# Altium PCB PCB2.PcbDoc
Units mil, origin at the board's own origin, x right, y up, seen from the top; angles counter-clockwise.
Board outline 2980 x 1985 mil, 2 copper layers (Top Layer, Bottom Layer); 26 components, 20 nets, 129 pads, 4 vias.
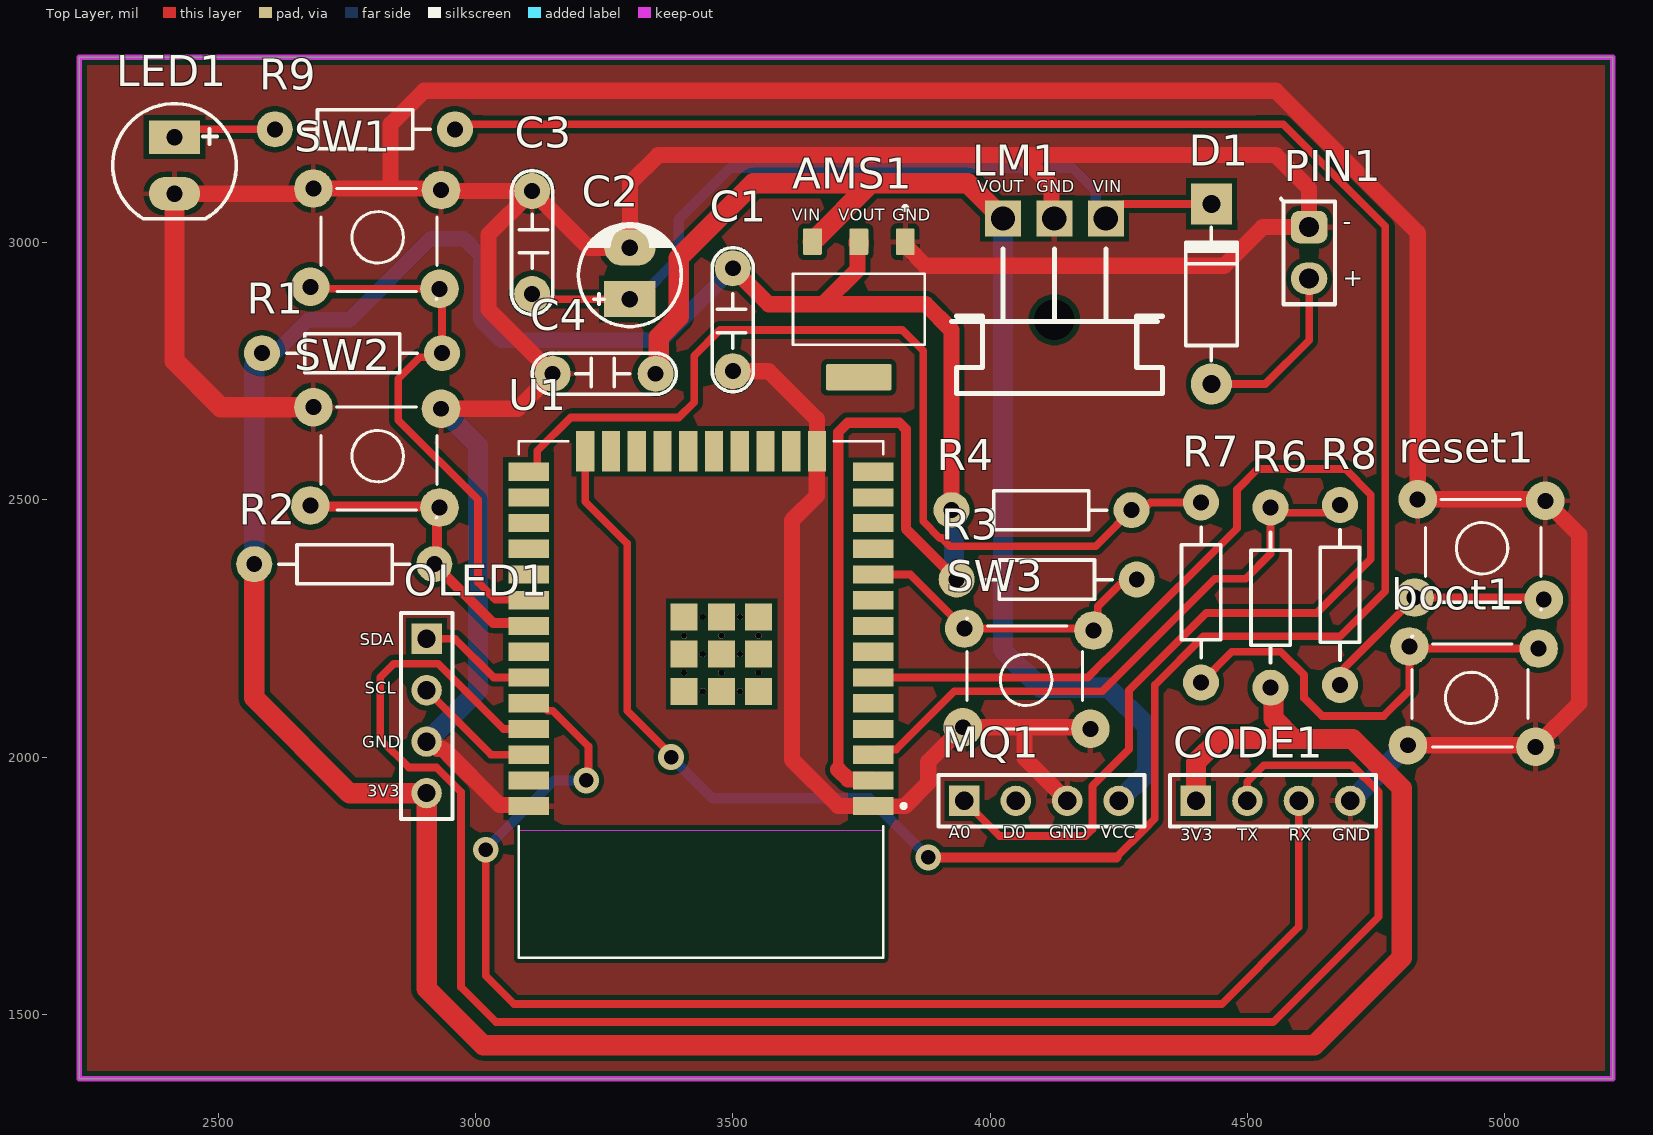
[diagram p0: Top Layer view]
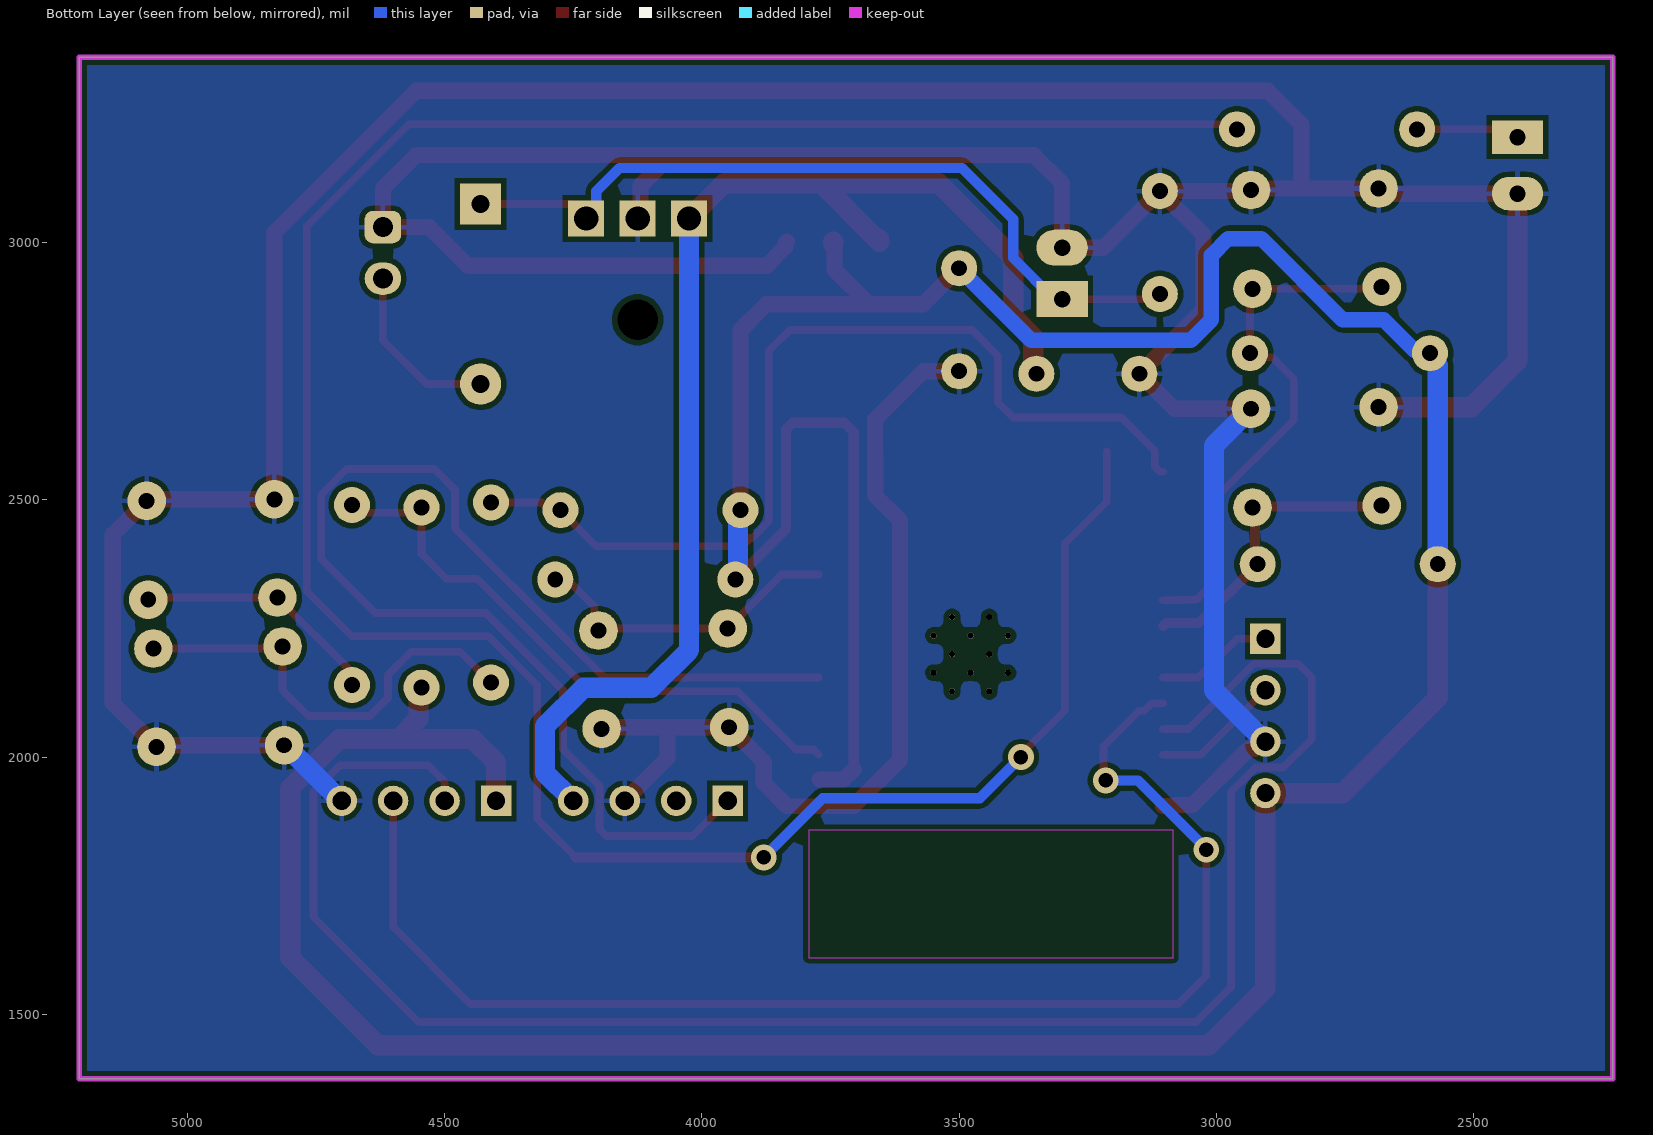
[diagram p1: Bottom Layer view, seen from below]
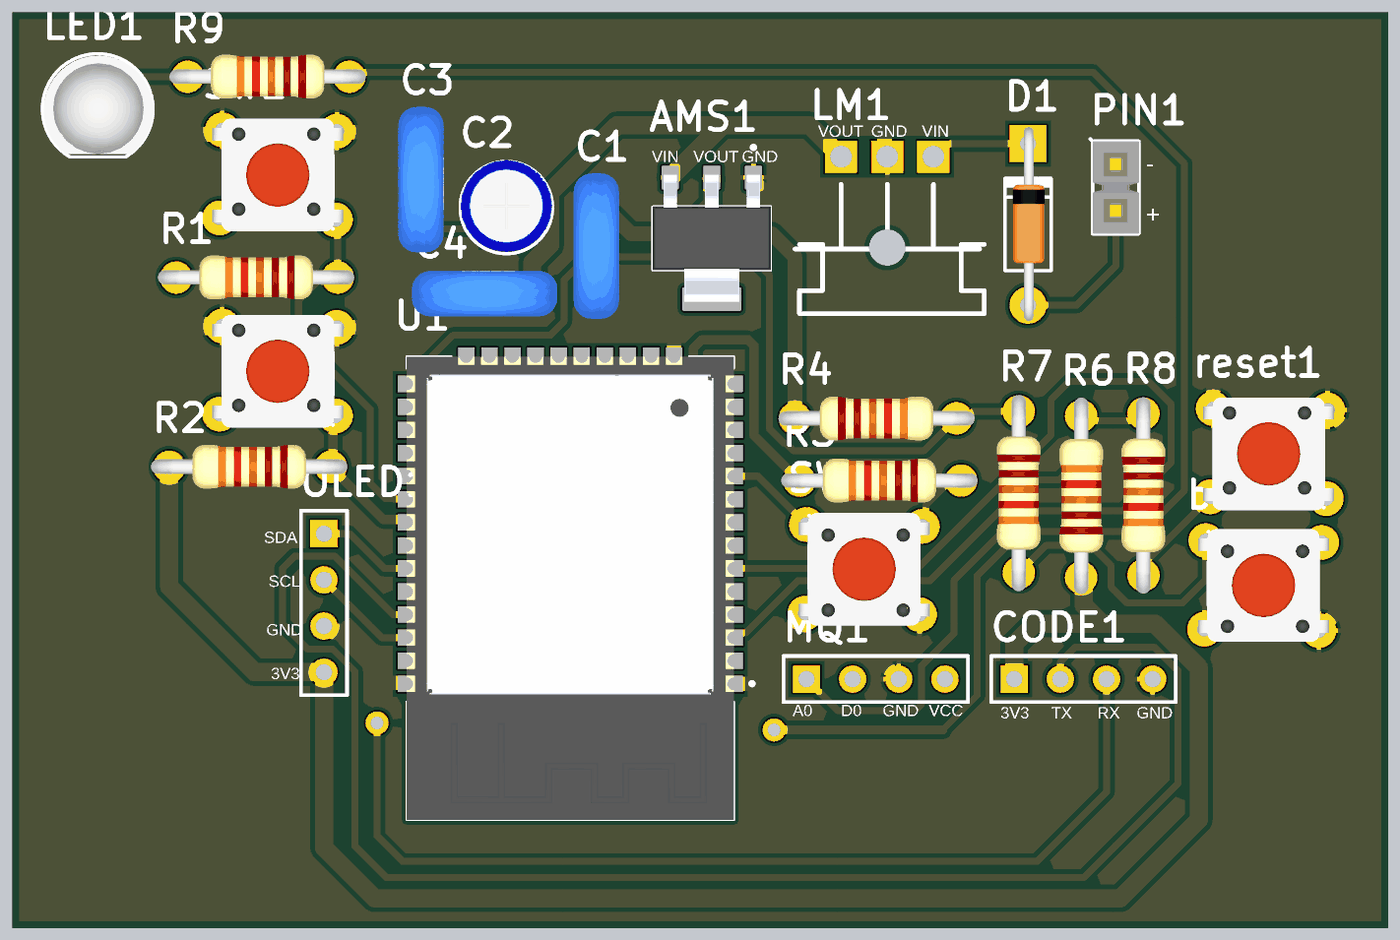
[diagram p2: 3D render of the assembled board from above, using the file's embedded part models]

## Layer stack, top to bottom
Top Solder: solder mask 0.4, Solder Resist, Dk 3.5
Top Layer: signal copper 1.4
Dielectric 1: dielectric 12.6, FR-4, Dk 4.8
Bottom Layer: signal copper 1.4
Bottom Solder: solder mask 0.4, Solder Resist, Dk 3.5

## Board outline
2230,1375 5210,1375 5210,3360 2230,3360

## Design rules (kind name [scope] priority, off if disabled: settings)
Clearance Clearance_1 [All] p1: gap=10 ignorepadtopadclearanceinfootprint=FALSE
Clearance IO2 [InNet('I02') And OnLayer('Top Layer') vs InNet('I02') And OnLayer('Top Layer')] p2: gap=0.3 ignorepadtopadclearanceinfootprint=FALSE
HoleSize [All] p1: absolutevalues=TRUE maxlimit=100 minlimit=11.81 maxpercent=80.000 minpercent=20.000
MinimumAnnularRing [All] p1: minimumring=5.91
PolygonConnect [All] p1: connectstyle=Relief reliefconductorwidth=10 reliefentries=4 polygonreliefangle="90 Angle" airgapwidth=10
RoutingVias [All] p1: holewidth=28 width=50 viastyle="Through Hole" minholewidth=28 minwidth=50 maxholewidth=28 maxwidth=50
SolderMaskExpansion [All] p1: expansion=4 istentingtop=FALSE
SupplyNets "Schematic Supply Nets_3" [InNet('5V')] p1: voltage=0.000
SupplyNets "Schematic Supply Nets_2" [InNet('GND')] p2: voltage=0.000
SupplyNets "Schematic Supply Nets_1" [InNet('3.3V')] p3: voltage=0.000
Width 5V [InNet('5V')] p1: maxlimit=39.37 minlimit=19.68 preferedwidth=31.5
Width GND [InNet('GND')] p2: maxlimit=39.37 minlimit=19.68 preferedwidth=31.5
Width 3.3V [InNet('3.3V')] p3: maxlimit=39.37 minlimit=19.68 preferedwidth=31.5
Width [All] p4: maxlimit=20 minlimit=10 preferedwidth=15
29 further rules are at their usual default settings.

## Components (designator, comment, footprint, x,y, rotation, side; value= is the part's Value field where it differs from the comment)
AMS1 "AMS1117-3.3" SOT229P700X180-4N 3745,2870 r270 top
boot1 "boot" SW4 5060,2020 r180 top value="Button chip 4 pin"
C1 "104" CN2 3500,2750 r90 top value=0.1uF
C2 "10uF" CP1/2 3300,2890 r90 top value=10uF/50V
C3 "104" CN2 3110,3100 r270 top value=0.1uF
C4 "104" CN2 3150,2745 r0 top value=0.1uF
CODE1 "code" HDR1X4 4400,1915 r0 top
D1 "1N4007" D1A 4430,2725 r270 top
LED1 "LED" LED-5TRED 2415,3150 r270 top value="LED 3 ly Single Colour"
LM1 "LM7805" TO-220 4225,3046.85 r180 top
MQ1 "MQ3" HDR1X4 3950,1915 r0 top
OLED1 "OLED" HDR1X4 2905,2230 r270 top
PIN1 "pin 9v" HDR/Header/2 4620,2980 r270 top
R1 "10k" R1/4W 2585,2785 r0 top value="R1/4W - 1K"
R2 "10k" R1/4W 2570,2375 r0 top value="R1/4W - 1K"
R3 "10k" R1/4W 3935,2345 r0 top value="R1/4W - 1K"
R4 "10k" R1/4W 4275,2480 r180 top value="R1/4W - 1K"
R6 "10k" R1/4W 4545,2485 r270 top value="R1/4W - 1K"
R7 "470" R1/4W 4410,2145 r90 top value="R1/4W - 1K"
R8 "470" R1/4W 4680,2140 r90 top value="R1/4W - 1K"
R9 "220" R1/4W 2610,3220 r0 top value="R1/4W - 1K"
reset1 "reset" SW4 4831,2501 r0 top value="Button chip 4 pin"
SW1 "xe may" SW4 2685,3105 r0 top value="Button chip 4 pin"
SW2 "o to" SW4 2685,2680 r0 top value="Button chip 4 pin"
SW3 "SW" SW4 4195,2055 r180 top value="Button chip 4 pin"
U1 "ESP32-WROOM-32" MODULE_ESP32-WROOM-32 3438.39,2111.81 r180 top

## Footprints (in the part's own frame and the unit in brackets; to place one, negate y for a bottom-side part, rotate by r counter-clockwise, add the part's x,y. Pads: shape width x height; smd on the part's side, far side on the other; paste and mask are expansions set on the pad)
CN2 [mil]
  round 70 hole 31: 1(0,0) 2(200,0)
  silkscreen extent -40,-40 240,40, body extent -54,-44 260,55, height 407
CP1/2 [mil] "Tu hoa < 22uF/16>50V"
  rect 70x100 hole 32: 1(0,0)
  oval 70x100 hole 32: 2(100,0)
  silkscreen extent -53,-100 146,100, body extent -49,-99 149,99, height 287
D1A [mil] "Diode 1A, W 100mil, L 350mil"
  round 80 hole 35: 1(0,0)
  rect 80x80 hole 35: 2(-350,0)
  silkscreen extent -305,-50 -45,50, body extent -386,-33 34,36, height 84
HDR1X4 [mm] "Connector; Header; 4 Position"
  rect 1.5x1.5 hole 0.9: 1(0,0)
  round 1.5 hole 0.9: 2(2.54,0) 3(5.08,0) 4(7.62,0)
  silkscreen extent -1.27,-1.27 8.89,1.27, body extent -1.27,-1.27 8.89,1.27, height 7
HDR/Header/2 [mm]
  rrect50% 1.6x1.8 hole 1: 1(-1.27,0)
  oval 1.6x1.8 hole 1: 2(1.27,0)
  silkscreen extent -2.67,-1.4 2.54,1.27, body extent -2.54,-1.27 2.54,1.27, height 8.89
LED-5TRED [mil] "LED 2 PIN, 5 ly , Only colour, pin to pin 110mil"
  rect 65x100 hole 32: 1(-55,0)
  oval 65x100 hole 32: 2(55,0)
  silkscreen extent -120,-120 104,120, body extent -116,-117 98,120, height 339
MODULE_ESP32-WROOM-32 [mm]
  rect 2x0.9 smd: 1(-8.5,5.26) 2(-8.5,3.99) 3(-8.5,2.72) 4(-8.5,1.45) 5(-8.5,0.18) 6(-8.5,-1.09) 7(-8.5,-2.36) 8(-8.5,-3.63) 9(-8.5,-4.9) 10(-8.5,-6.17) 11(-8.5,-7.44) 12(-8.5,-8.71) 13(-8.5,-9.98) 14(-8.5,-11.25) 25(8.5,-11.25) 26(8.5,-9.98) 27(8.5,-8.71) 28(8.5,-7.44) 29(8.5,-6.17) 30(8.5,-4.9) 31(8.5,-3.63) 32(8.5,-2.36) 33(8.5,-1.09) 34(8.5,0.18) 35(8.5,1.45) 36(8.5,2.72) 37(8.5,3.99) 38(8.5,5.26)
  rect 0.9x2 smd: 15(-5.715,-12.25) 16(-4.445,-12.25) 17(-3.175,-12.25) 18(-1.905,-12.25) 19(-0.635,-12.25) 20(0.635,-12.25) 21(1.905,-12.25) 22(3.175,-12.25) 23(4.445,-12.25) 24(5.715,-12.25)
  rect 1.33x1.33 smd: 39_1(-2.835,-0.405) 39_2(-1,-0.405) 39_3(0.835,-0.405) 39_4(-2.835,-2.24) 39_5(-1,-2.24) 39_6(0.835,-2.24) 39_7(-2.835,-4.075) 39_8(-1,-4.075) 39_9(0.835,-4.075)
  round 0.3 hole 0.3: 39_10(-1.918,-0.405) 39_11(-0.083,-0.405) 39_12(-2.835,-1.323) 39_13(-1,-1.323) 39_14(0.835,-1.323) 39_15(-1.918,-2.24) 39_16(-0.083,-2.24) 39_17(-2.835,-3.157) 39_18(-1,-3.157) 39_19(0.835,-3.157) 39_20(-1.918,-4.075) 39_21(-0.083,-4.075)
  Keep-Out Layer region: 9,6.45 -9,6.45 -9,12.75 9,12.75
  Keep-Out Layer region: 9,6.45 -9,6.45 -9,12.75 9,12.75
  silkscreen extent -10.1,-12.75 9,12.75, body extent -9,-12.75 9,12.75, height 3.25
R1/4W [mil] "R 1/4W, 2 Pin, 350mil"
  round 70 hole 31: 1(0,0) 2(350,0)
  silkscreen extent 48,-38 302,38, body extent -40,-47 386,47, height 111
SOT229P700X180-4N [mm]
  rrect15% 1.31x0.93 smd: 1(-3.345,2.29) 2(-3.345,0) 3(-3.345,-2.29)
  rrect15% 1.31x3.24 smd: 4(3.345,0)
  silkscreen extent -5.1,-3.25 1.75,3.25, body extent -3.5,-3.25 3.5,3.25, height 1.8
SW4 [mil] "SW button 4pin, 250 x250 mil"
  round 75 hole 31: 1(0,0) 2(245,-195) 3(248,-3) 4(-6,-191)
  silkscreen extent 15,-215 240,0, body extent -36,-220 276,24, height 276
TO-220 [mil]
  round 70 hole 78.74 unplated: 0(100,196.85)
  rect 70x70 hole 47.24 unplated: 1(0,0) 2(100,0) 3(200,0)
  silkscreen extent -110,60 300,340

## Part data
AMS1: "Sot223/Pkg 1-Amp 3.3-Volt Low Drop Out Voltage Regulatator", Package="SOT-223 Seeed Technology", Availability="Not in stock", Check_prices=https://www.snapeda.com/parts/AMS1117-3.3/Advanced+Monolithic+Systems/view-part/?ref=eda, MF="Advanced Monolithic Systems", MP=AMS1117-3.3, Price=None, SnapEDA_Link=https://www.snapeda.com/parts/AMS1117-3.3/Advanced+Monolithic+Systems/view-part/?ref=snap
boot1 reset1 SW1 SW2 SW3: library part SW4, "Switch button 4 pin"
C1 C3 C4: library part CN2, "Cap np 104 => 105pF"
C2: library part CP1, "Cap P  0,1uF < 22uF , 16 - 50V", Description 1="10 => 220uF/6,3V/10V - 10uF => 100uF/16V", Description 2="0,1uF => 33uF/50V - 10uF => 22uF/63V", Description 3="0,47uF => 10uF/100V"
CODE1 MQ1 OLED1: library part "Header 4", "Header, 4-Pin, Right Angle", LatestRevisionDate=17-Jul-2002, LatestRevisionNote="Re-released for DXP Platform.", Publisher="Altium Limited"
D1: library part D1A, "Diode 1A"
LED1: "LED Single colour Green and Red"
LM1: "TO-220", Text Field1=70, Text Field2=30
PIN1: library part "Header 2", "Header, 2-Pin"
R1 R2 R3 R4 R6 R7 R8 R9: library part R1/4W, "Resistor 1/4W"
U1: "Bluetooth, WiFi 802.11b/g/n, Bluetooth v4.2 + EDR, Class 1, 2 and 3 Transceiver Module 2.4GHz ~ 2.5GHz Integrated, Trace Surface Mount", Package="Module Espressif Systems", Availability=Unavailable, MF="Espressif Systems", MP=ESP32-WROOM-32D, Price=None, SnapEDA_Link=https://www.snapeda.com/parts/ESP32-WROOM-32D/Espressif%20Systems/view-part/2768115/?ref=snap

## Via types
v1: diameter 50, hole 28, Top Layer to Bottom Layer, 4 vias

## Nets (pads, with @x,y where several pads share a name; then routed paths per layer and width w, separated by ;. In a path a pad name is that pad's centre, name@x,y a point inside that pad or via, vN(x,y) a via of type N, cw(c..) or ccw(c..) an arc to the next point about the centre after c; other vN are vias at no path point)
3.3V: AMS1.2 C1.2 CODE1.1 OLED1.4 R1.1 R2.1 R3.1 R4.2 R6.2 U1.2 | length 8007.4
  Top Layer w20: 3705,1975.77 3705,2631.55 3723.45,2650 3824,2650 3836.5,2637.5 3836.5,2443.5 R3.1
  Top Layer w31.5: C1.2 3570,2880 3655,2880 3675,2880 ; 3705,1975.77 3724.07,1956.69 U1.2@3771.06,1956.69 ; AMS1.2 3742.44,2999.13 3742.44,2947.44 3675,2880 ; R4.2 3925,2830 3875,2880 3675,2880
  Top Layer w39.37: R2.1 2570,2115 2755,1930 OLED1.4 2905,1550 3015,1440 3046,1440 4630,1440 4800,1610 4800,1939.99 4744.81,1995.17 ; AMS1.2@3745,2996.97 AMS1.2 ; CODE1.1 4400,1990 4445,2035 4590,2035 ; R6.2 4550.86,2129.14 4550.86,2074.14 4590,2035 ; 4744.81,1995.18 4705,2035 4590,2035
  Bottom Layer w30: R1.1@2590.86,2790.86 2615.86,2790.86 2674.69,2849.69 2705.64,2849.69 2705.95,2850 2755,2850 2912.66,3007.66 2977.34,3007.66 3010,2975 3010,2850 3050,2810 3360,2810 C1.2
  Bottom Layer w39.37: R2.1 2570,2761.71 2585,2776.71 R1.1 R1.1@2590.86,2790.86 ; R4.2 3930,2475 3930,2350 R3.1
5V: AMS1.3 C4.2 LM1.3 MQ1.4 | length 2472.8
  Top Layer w39.37: C4.2 3355.86,2750.86 3355.86,2816.32 3395,2855.46 3395,2970 3540,3115 3768.15,3115 ; AMS1.3 3656.22,3003.07 3656.22,3007.79 3660.94,3007.79 3768.15,3115 ; LM1.3 3956.85,3115 3768.15,3115
  Bottom Layer w39.37: LM1.3 4025,2208.06 4098.06,2135 4230,2135 4305,2060 4305,1970 MQ1.4
A0: MQ1.1 U1.6 | length 2482.3
  Top Layer w15: U1.6 4189.72,2154.72 4224.19,2189.19 4224.53,2189.19 4257.81,2222.47 4257.81,2222.81 4480,2445 4480,2520 4520,2560 4690,2560 4740,2510 4740,2385 4635,2280 4420,2280 4270,2130 4270,2015 4198.84,1943.84 4198.84,1860 4185.65,1846.81 4018.19,1846.81 MQ1.1
D0: MQ1.2
D18: R1.2 SW1.2 SW1.4 U1.30 | length 1060.7
  Top Layer w15: SW1.4 2683,2910 SW1.2 2930,2885 2935,2885 R1.2 2926.84,2776.84 2891.84,2776.84 2850,2735 2850,2655 3005,2500 3005,2339.8 3033.89,2310.34 3038.21,2306.02 3071.87,2305.35 U1.30
D19: R2.2 SW2.2 SW2.4 U1.31 | length 606
  Top Layer w20: SW2.4 2681,2487 2928,2487 SW2.2 2925,2480 2925,2380 R2.2 3034.37,2260.63 3097.83,2260.63 U1.31
  Bottom Layer w20: SW2.4 SW2.4@2681,2487 ; SW2.2@2928,2487 SW2.2
D25: R3.2 SW3.2 SW3.4 U1.10 | length 620.6
  Top Layer w15: U1.10 3845.28,2354.72 SW3.2 4197,2250 SW3.4 4209.18,2254.18 4209.18,2292.68 4250.98,2334.48 4274.48,2334.48 R3.2
EN: R6.1 R8.2 U1.3 | length 1169
  Top Layer w15: U1.3 3783.25,2014.94 3817.65,2014.94 3930.62,2127.91 4217.91,2127.91 4436.84,2346.84 4496.84,2346.84 4545,2395 R6.1 4555,2475 4650.12,2475 4665.12,2490 R8.2
GND: AMS1.1 boot1.1 boot1.3 C1.1 C2.2 C3.1 C4.1 CODE1.4 LED1.2 LM1.2 MQ1.3 OLED1.3 PIN1.1 reset1.1 reset1.3 SW1.1 SW1.3 SW2.1 SW2.3 SW3.1 SW3.3 U1.1 U1.15 U1.38 | length 11524.9
  Top Layer w30: U1.1@3733.66,1905.25 3733.66,1904.72 U1.1 3834.72,1904.72
  Top Layer w31.5: LED1.2 2425.56,3095 2663.23,3095 2673.23,3105 SW1.1 2834.97,3105 ; OLED1.3 2912.46,2030 2926.24,2016.22 2934.91,2016.22 2937.23,2013.9 2939.75,2013.9 3046.96,1906.69 3080.12,1906.69 3082.09,1904.72 U1.38 ; SW2.3 3082,2677 C4.1 3025,2870 3025,3015 C3.1 ; C1.1 3570,2750 3663.39,2656.61 U1.15 3663.29,2593.99 3663.29,2508.29 3615,2460 3615,1995 3704.75,1905.25 U1.1@3733.66,1905.25 ; 3834.72,1904.72 3880,1950 3880,1991 SW3.3 4079.4,2058 ; AMS1.1 3837.72,2999.13 3837.72,2991.44 3874.16,2955 4455,2955 4530,3030 PIN1.1 4620,3105 4555,3170 4060,3170 ; 4067,2058 4067,1998 MQ1.3 ; 4082.55,2058 4192,2058 SW3.1 ; LM1.2 4119.36,3052.49 4119.36,3110.64 4060,3170 ; boot1.3 5057,2023 boot1.1 5144.87,2104.87 5144.87,2432.13 reset1.3 5076,2501 reset1.1 4831,3019 4555,3295 2900,3295 2834.97,3229.97 2834.97,3105 ; 2834.97,3105 2930,3105 SW1.3 2935,3100 C3.1 ; C3.1 3220,2990 C2.2 3300,3115 3355,3170 4060,3170
  Top Layer w39.37: LED1.2 2415,2770 2505,2680 SW2.1
  Bottom Layer w39.37: OLED1.3 3005,2130 3005,2605 SW2.3 ; CODE1.4 4702,1915 4810,2023 boot1.3
I02: R9.2 U1.24 | length 5084.1
  Top Layer w15: R9.2 2970,3230 4570,3230 4768.19,3031.81 4768.19,2322.19 4680.66,2234.66 4414.66,2234.66 4320,2140 4320,1880 4300,1860 4245,1805 ; U1.24 3213.39,2496.61 3295,2415 3295,2090 v1@3372.38,2012.62
  Top Layer w20: v1(3880,1805) 4245,1805
  Bottom Layer w20: v1(3380,2000) 3460,1920 3765,1920 v1@3878.01,1806.99
IDO: R4.1 R7.2 U1.25 | length 1893.9
  Top Layer w15: U1.25 3109.78,2554.72 3120,2564.94 3120,2595 3185,2660 3395,2660 3425,2690 3425,2780 3475,2830 3829.5,2830 3870,2789.5 3870,2458.19 3902.5,2425.69 3906.31,2425.69 3922,2410 4205,2410 4285.52,2490.52 4306.81,2490.52 4311.29,2495 R7.2
Netboot1_2: boot1.2 boot1.4 R7.1 | length 866.4
  Top Layer w15: R7.1 4470,2205 4565,2205 4610,2160 4610,2115 4645,2080 4765,2080 4815,2130 boot1.2 4819,2211 boot1.4
NetC2_1: C2.1 C3.2 D1.2 LM1.1 | length 1545.4
  Top Layer w15: C3.2 3120,2890 C2.1 ; LM1.1 4252.5,3074.35 4260.64,3074.35 4261.29,3075 D1.2
  Bottom Layer w20: C2.1 3315,2890 3395,2970 3395,3045 3495,3145 4160,3145 4205.36,3099.64 4205.36,3066.49 LM1.1
NetD1_1: D1.1 PIN1.2 | length 345.2
  Top Layer w15: D1.1 4535,2725 4620,2810 PIN1.2
NetLED1_1: LED1.1 R9.1 | length 176.2
  Top Layer w15: LED1.1 2430,3220 R9.1@2585,3220
NetR8_1: R8.1 reset1.2 reset1.4 | length 482.7
  Top Layer w15: R8.1 4680,2165 reset1.4 5072,2310 reset1.2
RX: CODE1.3 U1.34 | length 2625.3
  Top Layer w15: v1(3020,1820) 3020,1575 3075,1520 4450,1520 4600,1670 CODE1.3 ; U1.34 3125.39,2104.72 3140.18,2089.94 3150.36,2089.94 3219.42,2020.88 3219.42,1959.14 v1(3215,1954.72)
  Bottom Layer w20: v1(3020,1820) 3020,1822.1 3152.62,1954.72 v1(3215,1954.72)
SCL: OLED1.2 U1.36 | length 250.6
  Top Layer w15: OLED1.2 3030.28,2004.72 U1.36
SDA: OLED1.1 U1.33 | length 229.9
  Top Layer w15: OLED1.1 2960,2230 3035.28,2154.72 U1.33
TX: CODE1.2 U1.35 | length 3516
  Top Layer w15: U1.35 3054.28,2054.72 2927.84,2181.16 2841.16,2181.16 2815,2155 2815,2035 2870,1980 2924.07,1980 2972,1932.07 2972,1553 3040,1485 4550,1485 4755,1690 4755,1932.4 4703.25,1984.14 4532,1984.14 4500,1952.14 CODE1.2
pads on no net: AMS1.4 LM1.0 U1.4 U1.5 U1.7 U1.8 U1.9 U1.11 U1.12 U1.13 U1.14 U1.16 U1.17 U1.18 U1.19 U1.20 U1.21 U1.22 U1.23 U1.26 U1.27 U1.28 U1.29 U1.32 U1.37 U1.39_1 U1.39_2 U1.39_3 U1.39_4 U1.39_5 U1.39_6 U1.39_7 U1.39_8 U1.39_9 U1.39_10 U1.39_11 U1.39_12 U1.39_13 U1.39_14 U1.39_15 U1.39_16 U1.39_17 U1.39_18 U1.39_19 U1.39_20 U1.39_21

## Polygon pours and split planes (outlines as drawn)
GND on Bottom Layer "GND_L02_P030" (solid, remove dead copper, pour order 30): 2240,3355 5200,3355 5205,3360 5205,1375 2230,1375
GND on Bottom Layer "GND_L02_P025" (solid, pour order 25): 2235,3360 5205,3360 5205,1375 5200,1370 5195,1375 2230,1375
GND on Bottom Layer "GND_L02_P002" (solid, pour order 2): 2235,3360 2240,3355 5200,3355 5200,1370 5195,1375 2230,1375
GND on Top Layer "GND_L01_P029" (solid, remove dead copper, pour order 29): 2230,3360 5205,3360 5205,1375 5200,1380 2230,1380
GND on Top Layer "GND_L01_P026" (solid, pour order 26): 2230,3360 5205,3360 5205,1375 5200,1380 2230,1380

## Keep-outs
Keep-Out Layer:
  lines w10: 5210,1375 2230,1375 2230,3360 5210,3360 5210,1375 ; 5210,1375 5210,1375

## Silkscreen, mask and mechanical layers (free items; w line width, h text height)
Top Overlay:
  text "VOUT" at 3975,3090 h40
  text "GND" at 4090,3090 h40
  text "VIN" at 4200,3090 h40
  text "VIN" at 3615,3035 h40
  text "VOUT" at 3705,3035 h40
  text "GND" at 3810,3035 h40
  text "-" at 4685,3013.46 h60
  text "+" at 4685,2903.78 h60
  text "SDA" at 2775,2210 h40
  text "SCL" at 2785,2115 h40
  text "GND" at 2780,2010 h40
  text "3V3" at 2790,1915 h40
  text "A0" at 3920,1835 h40
  text "D0" at 4025,1835 h40
  text "GND" at 4115,1835 h40
  text "VCC" at 4215,1835 h40
  text "3V3" at 4370,1830 h40
  text "TX" at 4480,1830 h40
  text "RX" at 4580,1830 h40
  text "GND" at 4665,1830 h40

## Text inside footprints (layer, text, board x,y; h text height)
U1: Mechanical 13 "ANTENNA" at 3674.61,1757.48 h70 r180